# Altium PCB PCB.PCBDOC (part 3 of 3)
Units mil, origin at the board's own origin, x right, y up, seen from the top; angles counter-clockwise.
Board outline 2850 x 2710 mil, 2 copper layers (Top Layer, Bottom Layer); 25 components, 0 nets, 106 pads, 0 vias.
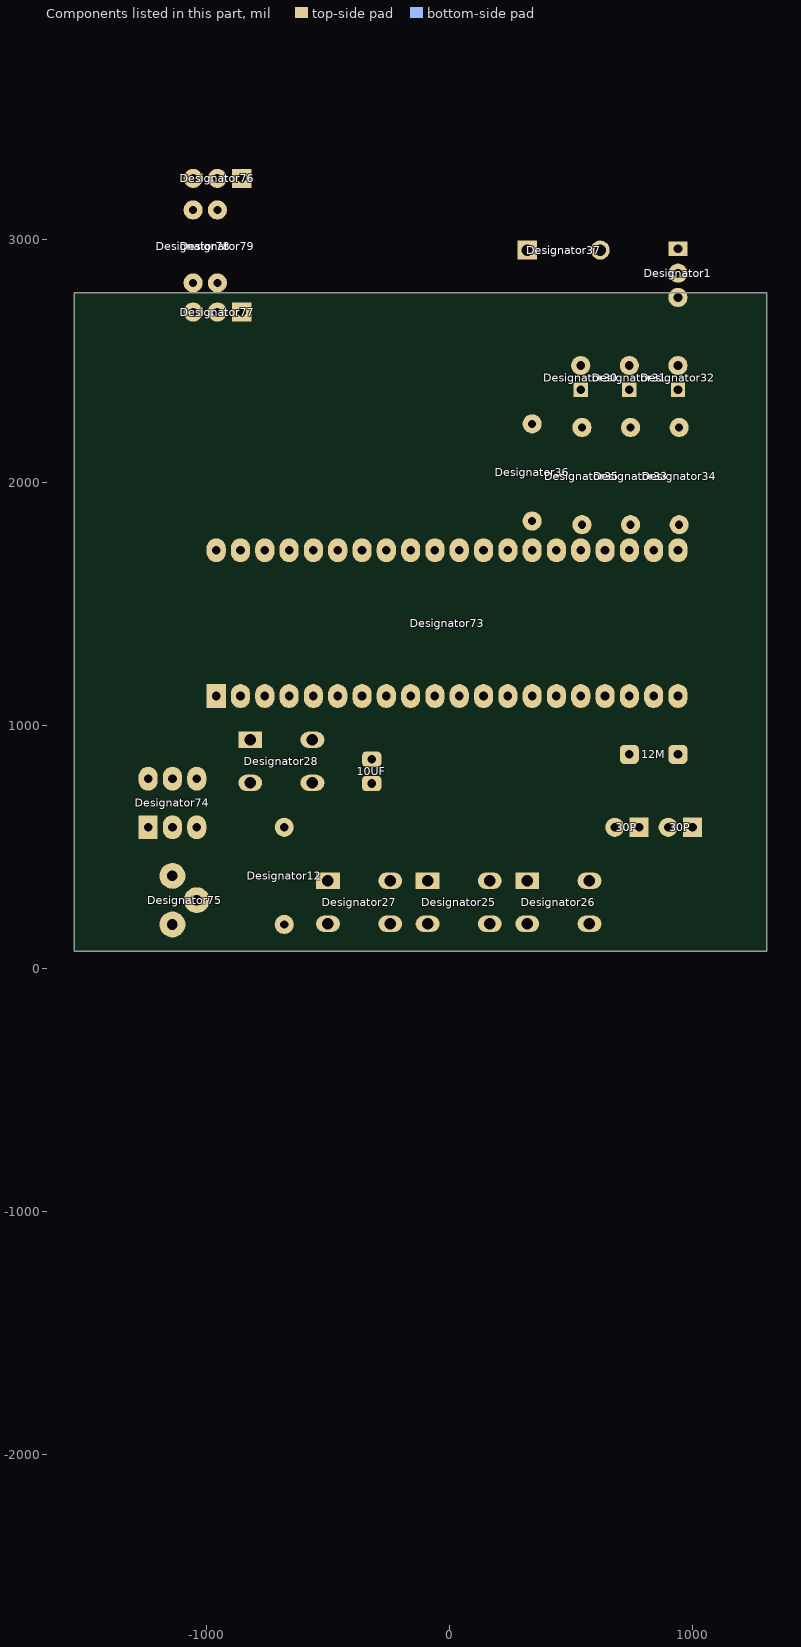
[diagram p3: the components of this part, seen from the top]

## Nets (pads, with @x,y where several pads share a name; then routed paths per layer and width w, separated by ;. In a path a pad name is that pad's centre, name@x,y a point inside that pad or via, vN(x,y) a via of type N, cw(c..) or ccw(c..) an arc to the next point about the centre after c; other vN are vias at no path point) (continued)
copper on no net: (continued)
  Bottom Layer w1: 574,-2412 591,-2412 ; 574,-2411 591,-2411 ; 574,-2410 591,-2410 ; 574,-2409 591,-2409 ; 574,-2408 591,-2408 ; 574,-2407 591,-2407 ; 574,-2406 591,-2406 ; 574,-2405 591,-2405 ; 574,-2404 591,-2404 ; 574,-2403 591,-2403 ; 574,-2402 591,-2402 ; 574,-2401 591,-2401 ; 574,-2400 591,-2400 ; 574,-2399 591,-2399 ; 574,-2398 591,-2398 ; 574,-2397 591,-2397 ; 574,-2396 591,-2396 ; 574,-2395 591,-2395 ; 574,-2394 591,-2394 ; 574,-2393 591,-2393 ; 574,-2392 591,-2392 ; 574,-2391 591,-2391 ; 574,-2390 591,-2390 ; 574,-2389 591,-2389 ; 574,-2388 591,-2388 ; 574,-2387 591,-2387 ; 595,-2527 622,-2527 ; 599,-2526 622,-2526 ; 602,-2525 621,-2525 ; 606,-2524 621,-2524 ; 609,-2523 621,-2523 ; 613,-2571 774,-2571 ; 613,-2570 774,-2570 ; 613,-2569 774,-2569 ; 613,-2568 774,-2568 ; 613,-2567 774,-2567 ; 613,-2566 774,-2566 ; 613,-2565 774,-2565 ; 613,-2564 774,-2564 ; 613,-2563 774,-2563 ; 613,-2562 774,-2562 ; 613,-2561 774,-2561 ; 613,-2560 774,-2560 ; 613,-2559 774,-2559 ; 613,-2558 774,-2558 ; 613,-2557 774,-2557 ; 613,-2556 774,-2556 ; 613,-2522 621,-2522 ; 616,-2521 621,-2521 ; 619,-2520 621,-2520 ; 627,-2521 764,-2521 ; 627,-2520 764,-2520 ; 627,-2519 764,-2519 ; 627,-2518 764,-2518 ; 627,-2517 764,-2517 ; 627,-2516 764,-2516 ; 627,-2515 764,-2515 ; 627,-2514 764,-2514 ; 627,-2513 764,-2513 ; 627,-2512 764,-2512 ; 627,-2511 764,-2511 ; 627,-2510 764,-2510 ; 627,-2509 764,-2509 ; 627,-2508 764,-2508 ; 627,-2507 764,-2507 ; 627,-2506 764,-2506 ; 632,-2483 649,-2483 ; 632,-2482 649,-2482 ; 632,-2481 649,-2481 ; 632,-2480 649,-2480 ; 632,-2479 649,-2479 ; 632,-2478 649,-2478 ; 632,-2477 649,-2477 ; 632,-2476 649,-2476 ; 632,-2475 649,-2475 ; 632,-2474 759,-2474 ; 632,-2473 759,-2473 ; 632,-2472 759,-2472 ; 632,-2471 759,-2471 ; 632,-2470 759,-2470 ; 632,-2469 759,-2469 ; 632,-2468 759,-2468 ; 632,-2467 759,-2467 ; 632,-2466 759,-2466 ; 632,-2465 759,-2465 ; 632,-2464 759,-2464 ; 632,-2463 759,-2463 ; 632,-2462 759,-2462 ; 632,-2461 759,-2461 ; 632,-2460 759,-2460 ; 632,-2459 759,-2459 ; 632,-2458 649,-2458 ; 632,-2457 649,-2457 ; 632,-2456 649,-2456 ; 632,-2455 649,-2455 ; 632,-2454 649,-2454 ; 632,-2453 649,-2453 ; 632,-2452 649,-2452 ; 632,-2451 649,-2451 ; 632,-2450 649,-2450 ; 632,-2449 649,-2449 ; 632,-2448 649,-2448 ; 632,-2447 649,-2447 ; 632,-2446 649,-2446 ; 632,-2445 649,-2445 ; 632,-2444 649,-2444 ; 632,-2443 649,-2443 ; 632,-2442 649,-2442 ; 632,-2441 649,-2441 ; 632,-2440 649,-2440 ; 632,-2439 649,-2439 ; 632,-2438 649,-2438 ; 632,-2437 649,-2437 ; 632,-2436 649,-2436 ; 632,-2435 649,-2435 ; 632,-2434 649,-2434 ; 632,-2433 649,-2433 ; 632,-2432 649,-2432 ; 632,-2431 649,-2431 ; 632,-2430 649,-2430 ; 632,-2429 649,-2429 ; 632,-2428 649,-2428 ; 632,-2427 649,-2427 ; 632,-2426 759,-2426 ; 632,-2425 759,-2425 ; 632,-2424 759,-2424 ; 632,-2423 759,-2423 ; 632,-2422 759,-2422 ; 632,-2421 759,-2421 ; 632,-2420 759,-2420 ; 632,-2419 759,-2419 ; 632,-2418 759,-2418 ; 632,-2417 759,-2417 ; 632,-2416 759,-2416 ; 632,-2415 759,-2415 ; 632,-2414 759,-2414 ; 632,-2413 759,-2413 ; 632,-2412 759,-2412 ; 632,-2411 759,-2411 ; 632,-2410 649,-2410 ; 632,-2409 649,-2409 ; 632,-2408 649,-2408 ; 632,-2407 649,-2407 ; 632,-2406 649,-2406 ; 632,-2405 649,-2405 ; 632,-2404 649,-2404 ; 632,-2403 649,-2403 ; 632,-2402 649,-2402 ; 632,-2401 649,-2401 ; 632,-2400 649,-2400 ; 632,-2399 649,-2399 ; 632,-2398 649,-2398 ; 632,-2397 649,-2397 ; 632,-2396 649,-2396 ; 632,-2395 649,-2395 ; 632,-2394 649,-2394 ; 632,-2393 649,-2393 ; 632,-2392 649,-2392 ; 632,-2391 649,-2391 ; 632,-2390 649,-2390 ; 632,-2389 649,-2389 ; 632,-2388 649,-2388 ; 632,-2387 649,-2387 ; 632,-2386 649,-2386 ; 632,-2385 649,-2385 ; 632,-2384 649,-2384 ; 632,-2383 649,-2383 ; 632,-2382 649,-2382 ; 632,-2381 649,-2381 ; 632,-2380 649,-2380 ; 632,-2379 649,-2379 ; 632,-2378 759,-2378 ; 632,-2377 759,-2377 ; 632,-2376 759,-2376 ; 632,-2375 759,-2375 ; 632,-2374 759,-2374 ; 632,-2373 759,-2373 ; 632,-2372 759,-2372 ; 632,-2371 759,-2371 ; 632,-2370 759,-2370 ; 632,-2369 759,-2369 ; 632,-2368 759,-2368 ; 632,-2367 759,-2367 ; 632,-2366 759,-2366 ; 632,-2365 759,-2365 ; 632,-2364 759,-2364 ; 632,-2363 759,-2363 ; 687,-2555 704,-2555 ; 687,-2554 704,-2554 ; 687,-2553 704,-2553 ; 687,-2552 704,-2552 ; 687,-2551 704,-2551 ; 687,-2550 704,-2550 ; 687,-2549 704,-2549 ; 687,-2548 704,-2548 ; 687,-2547 704,-2547 ; 687,-2546 704,-2546 ; 687,-2545 704,-2545 ; 687,-2544 704,-2544 ; 687,-2543 704,-2543 ; 687,-2542 704,-2542 ; 687,-2541 704,-2541 ; 687,-2540 704,-2540 ; 687,-2539 704,-2539 ; 687,-2538 704,-2538 ; 687,-2537 704,-2537 ; 687,-2536 704,-2536 ; 687,-2535 704,-2535 ; 687,-2534 704,-2534 ; 687,-2533 704,-2533 ; 687,-2532 704,-2532 ; 687,-2531 704,-2531 ; 687,-2530 704,-2530 ; 687,-2529 704,-2529 ; 687,-2528 704,-2528 ; 687,-2527 704,-2527 ; 687,-2526 704,-2526 ; 687,-2525 704,-2525 ; 687,-2524 704,-2524 ; 687,-2523 704,-2523 ; 687,-2522 704,-2522 ; 687,-2505 704,-2505 ; 687,-2504 704,-2504 ; 687,-2503 704,-2503 ; 687,-2502 704,-2502 ; 687,-2501 704,-2501 ; 687,-2500 704,-2500 ; 687,-2499 704,-2499 ; 687,-2498 704,-2498 ; 687,-2497 704,-2497 ; 687,-2496 704,-2496 ; 687,-2495 704,-2495 ; 687,-2494 704,-2494 ; 687,-2493 704,-2493 ; 687,-2492 704,-2492 ; 687,-2491 704,-2491 ; 687,-2490 704,-2490 ; 687,-2489 704,-2489 ; 687,-2488 704,-2488 ; 687,-2487 704,-2487 ; 687,-2486 704,-2486 ; 687,-2485 704,-2485 ; 687,-2484 704,-2484 ; 687,-2483 704,-2483 ; 687,-2482 704,-2482 ; 687,-2481 704,-2481 ; 687,-2480 704,-2480 ; 687,-2479 704,-2479 ; 687,-2478 704,-2478 ; 687,-2477 704,-2477 ; 687,-2476 704,-2476 ; 687,-2475 704,-2475 ; 687,-2458 704,-2458 ; 687,-2457 704,-2457 ; 687,-2456 704,-2456 ; 687,-2455 704,-2455 ; 687,-2454 704,-2454 ; 687,-2453 704,-2453 ; 687,-2452 704,-2452 ; 687,-2451 704,-2451 ; 687,-2450 704,-2450 ; 687,-2449 704,-2449 ; 687,-2448 704,-2448 ; 687,-2447 704,-2447 ; 687,-2446 704,-2446 ; 687,-2445 704,-2445 ; 687,-2444 704,-2444 ; 687,-2443 704,-2443 ; 687,-2442 704,-2442 ; 687,-2441 704,-2441 ; 687,-2440 704,-2440 ; 687,-2439 704,-2439 ; 687,-2438 704,-2438 ; 687,-2437 704,-2437 ; 687,-2436 704,-2436 ; 687,-2435 704,-2435 ; 687,-2434 704,-2434 ; 687,-2433 704,-2433 ; 687,-2432 704,-2432 ; 687,-2431 704,-2431 ; 687,-2430 704,-2430 ; 687,-2429 704,-2429 ; 687,-2428 704,-2428 ; 687,-2427 704,-2427 ; 687,-2410 704,-2410 ; 687,-2409 704,-2409 ; 687,-2408 704,-2408 ; 687,-2407 704,-2407 ; 687,-2406 704,-2406 ; 687,-2405 704,-2405 ; 687,-2404 704,-2404 ; 687,-2403 704,-2403 ; 687,-2402 704,-2402 ; 687,-2401 704,-2401 ; 687,-2400 704,-2400 ; 687,-2399 704,-2399 ; 687,-2398 704,-2398 ; 687,-2397 704,-2397 ; 687,-2396 704,-2396 ; 687,-2395 704,-2395 ; 687,-2394 704,-2394 ; 687,-2393 704,-2393 ; 687,-2392 704,-2392 ; 687,-2391 704,-2391 ; 687,-2390 704,-2390 ; 687,-2389 704,-2389 ; 687,-2388 704,-2388 ; 687,-2387 704,-2387 ; 687,-2386 704,-2386 ; 687,-2385 704,-2385 ; 687,-2384 704,-2384 ; 687,-2383 704,-2383 ; 687,-2382 704,-2382 ; 687,-2381 704,-2381 ; 687,-2380 704,-2380 ; 687,-2379 704,-2379 ; 741,-2483 759,-2483 ; 741,-2482 759,-2482 ; 741,-2481 759,-2481 ; 741,-2480 759,-2480 ; 741,-2479 759,-2479 ; 741,-2478 759,-2478 ; 741,-2477 759,-2477 ; 741,-2476 759,-2476 ; 741,-2475 759,-2475 ; 741,-2458 759,-2458 ; 741,-2457 759,-2457 ; 741,-2456 759,-2456 ; 741,-2455 759,-2455 ; 741,-2454 759,-2454 ; 741,-2453 759,-2453 ; 741,-2452 759,-2452 ; 741,-2451 759,-2451 ; 741,-2450 759,-2450 ; 741,-2449 759,-2449 ; 741,-2448 759,-2448 ; 741,-2447 759,-2447 ; 741,-2446 759,-2446 ; 741,-2445 759,-2445 ; 741,-2444 759,-2444 ; 741,-2443 759,-2443 ; 741,-2442 759,-2442 ; 741,-2441 759,-2441 ; 741,-2440 759,-2440 ; 741,-2439 759,-2439 ; 741,-2438 759,-2438 ; 741,-2437 759,-2437 ; 741,-2436 759,-2436 ; 741,-2435 759,-2435 ; 741,-2434 759,-2434 ; 741,-2433 759,-2433 ; 741,-2432 759,-2432 ; 741,-2431 759,-2431 ; 741,-2430 759,-2430 ; 741,-2429 759,-2429 ; 741,-2428 759,-2428 ; 741,-2427 759,-2427 ; 741,-2410 759,-2410 ; 741,-2409 759,-2409 ; 741,-2408 759,-2408 ; 741,-2407 759,-2407 ; 741,-2406 759,-2406 ; 741,-2405 759,-2405 ; 741,-2404 759,-2404 ; 741,-2403 759,-2403 ; 741,-2402 759,-2402 ; 741,-2401 759,-2401 ; 741,-2400 759,-2400 ; 741,-2399 759,-2399 ; 741,-2398 759,-2398 ; 741,-2397 759,-2397 ; 741,-2396 759,-2396 ; 741,-2395 759,-2395 ; 741,-2394 759,-2394 ; 741,-2393 759,-2393 ; 741,-2392 759,-2392 ; 741,-2391 759,-2391 ; 741,-2390 759,-2390 ; 741,-2389 759,-2389 ; 741,-2388 759,-2388 ; 741,-2387 759,-2387 ; 741,-2386 759,-2386 ; 741,-2385 759,-2385 ; 741,-2384 759,-2384 ; 741,-2383 759,-2383 ; 741,-2382 759,-2382 ; 741,-2381 759,-2381 ; 741,-2380 759,-2380 ; 741,-2379 759,-2379
  Bottom Layer w15: -975,1120 -940,1155 ; -950,1155 -945,1155
  Bottom Layer w30: -1160,180 600,180 680,260 680,580 ; -1145,385 -1140,380 ; -955,1140 -950,1145 ; -564.09,762.83 -322.83,762.83 -320,760 ; -564.09,940 -370,940 -320,890 -320,860 ; -244.09,360 -244.09,375.91 450,1070 450,1145 ; 80,185 85,180 ; 165.91,360 165.91,645.91 550,1030 550,1145 ; 530,2480 540,2480 940,2480 1010,2480 1050,2440 1050,1210 985,1145 950,1145 980,1145 1015,1110 1015,535 980,500 700,500 670,530 670,565 670,585 ; 540,2380 540,2230 545,2225 ; 545,1825 545,1750 550,1745 ; 575.91,360 575.91,925.91 650,1000 650,1145 ; 725,875 750,900 750,1145 ; 734.67,884.67 734.67,655.33 780,610 780,580 ; 740,2380 740,2230 745,2225 ; 745,1750 745,1825 ; 850,1145 850,925 895,880 905,880 905,600 ; 940,2380 940,2230 945,2225 ; 945,1750 945,1825
  Bottom Layer w50: -1365,885 -970,885 -835,750 ; -1240,580 -1340,580 -1365,605 -1365,1715 -1290,1790 ; -1145,385 -1145,590 ; -1055,2820 -1055,2700 -1055,2620 -930,2495 130,2495 240,2385 240,1720 ; -1055,3120 -1055,3250 -1055,3340 -965,3430 230,3430 320,3340 320,2955 ; -1055,3240 -1205,3240 -1290,3155 -1290,1790 ; -960,1720 -1220,1720 -1290,1790 ; -955,2700 -955,2820 ; -955,3120 -955,3250 ; -855,3265 -855,2715 -840,2700 295,2700 495,2900 495,3080 575,3160 1005,3160 1085,3080 1085,2505 1060,2480 940,2480 ; -680,580 -240,580 -165,655 ; -320,860 -165,860 ; -160,670 -160,1120 ; 335,1725 335,1850 ; 340,2235 340,2525 675,2860 935,2860 ; 540,1720 545,1725 545,1825 ; 620,2955 935,2955 940,2960 ; 740,1720 745,1725 745,1825 ; 740,2485 745,2480 ; 940,2495 940,2770 ; 945,1715 945,1825

## Silkscreen, mask and mechanical layers (free items; w line width, h text height)
Top Overlay:
  circle w10: c470,2955 r215
  lines w10: 890,2715 cw(c1040,2865) 890,3015
  lines w20: -1545,70 -1545,3770 1305,3770 1305,70 -1545,70
  text "+" at 350,3025 h60 r90
  text "S8550" at 1005,2850 h60
  text "+" at 680,2345 h60 r90
  text "+" at 875,2345 h60 r90
  text "+" at 480,2340 h60 r90
  text "10uf" at -270,960 h60
  text "12M" at 1060,850 h60
  text "10k" at -745,315 h60 r90